# Altium PCB PCB.PcbDoc (part 1 of 2)
Units mm, origin at the board's own origin, x right, y up, seen from the top; angles counter-clockwise.
Board outline 100 x 100 mm, 2 copper layers (Top Layer, Bottom Layer); 45 components, 90 nets, 459 pads, 167 vias.
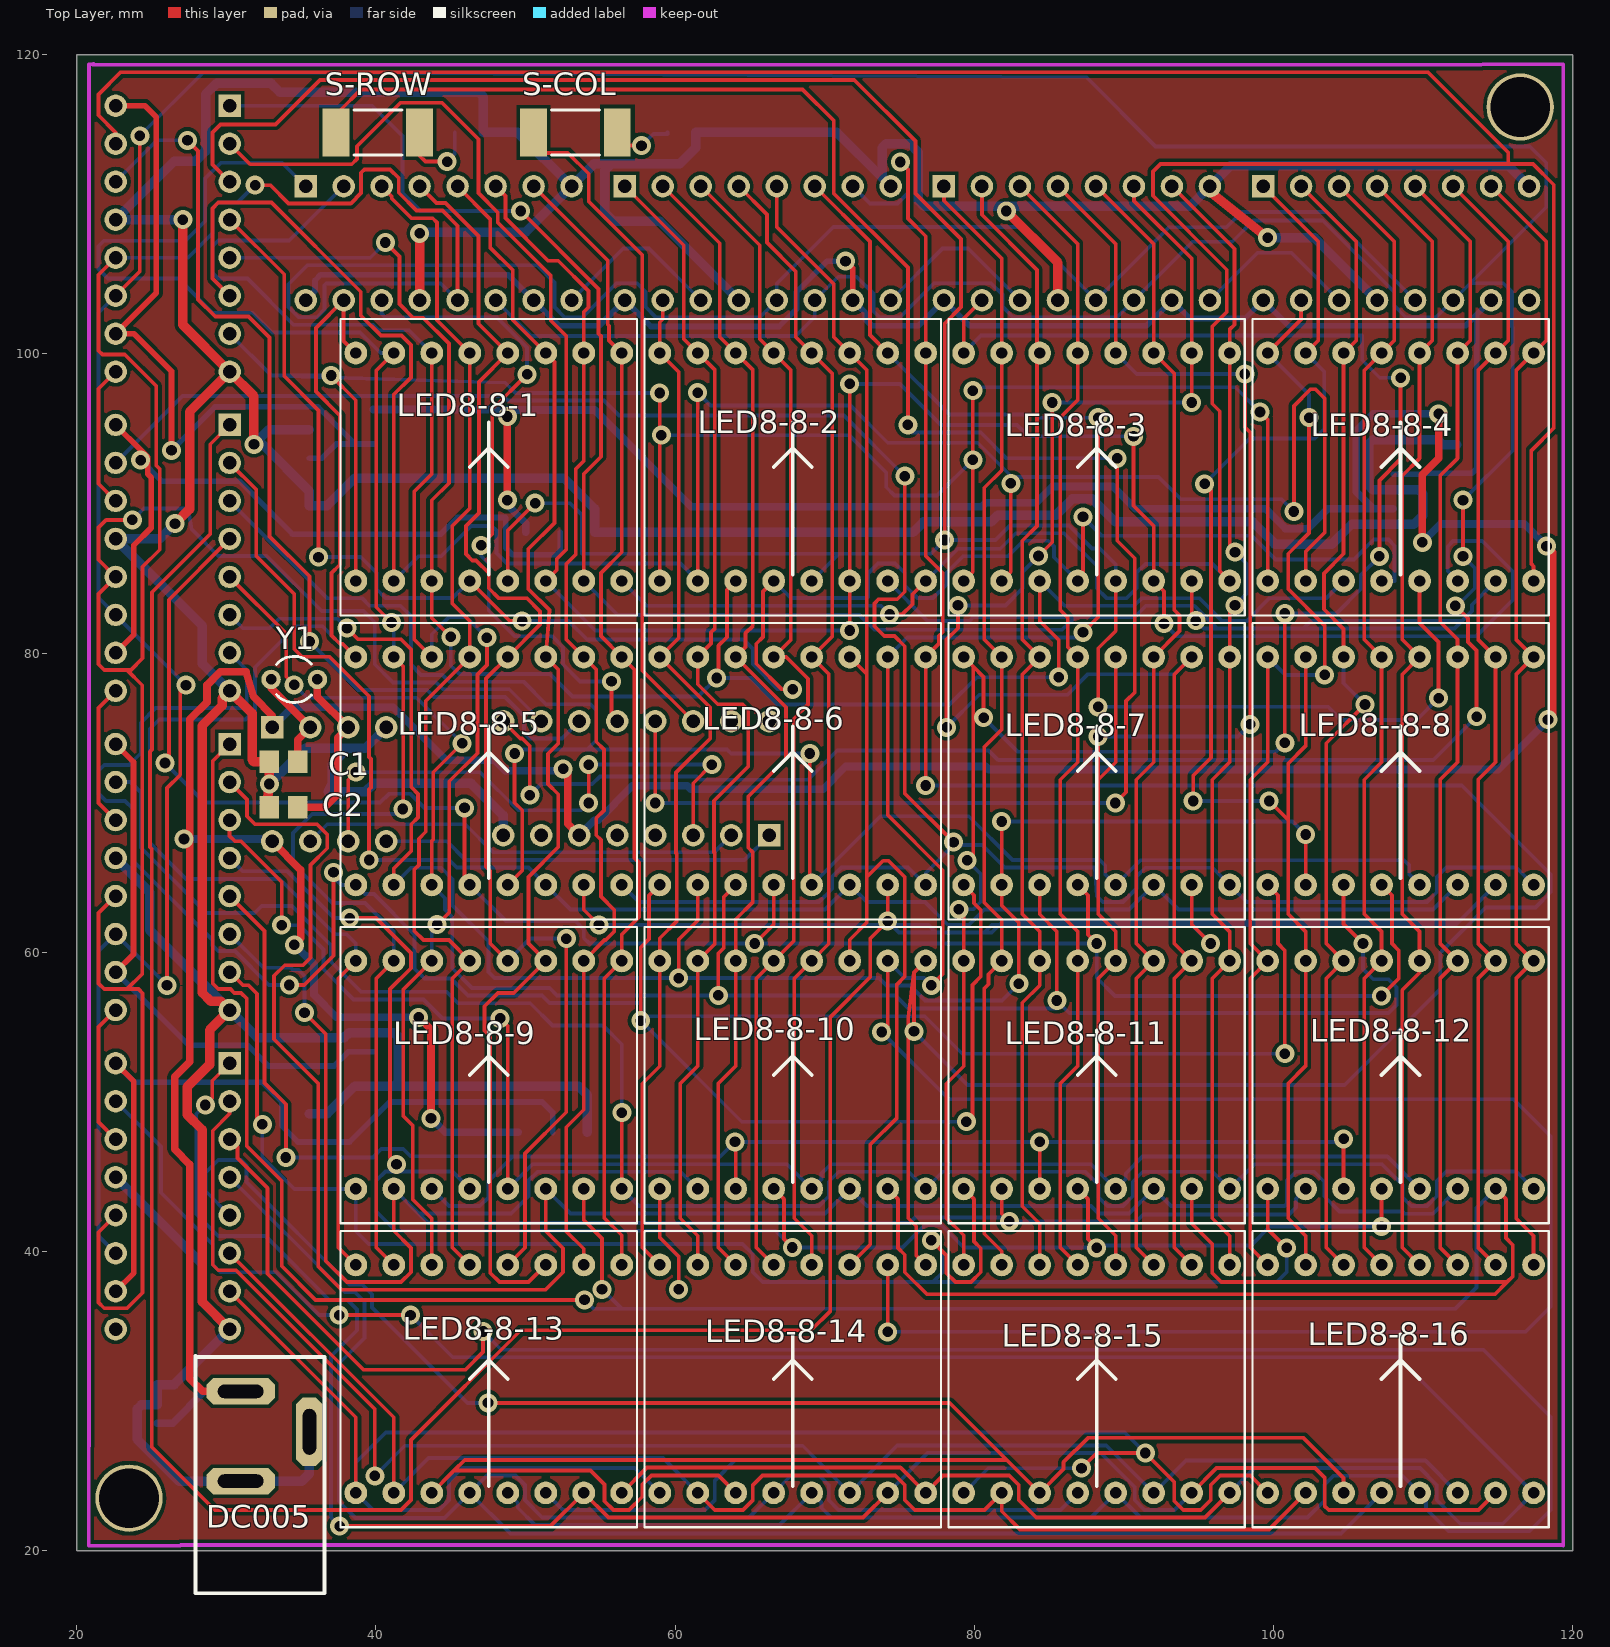
[diagram p0: Top Layer view]
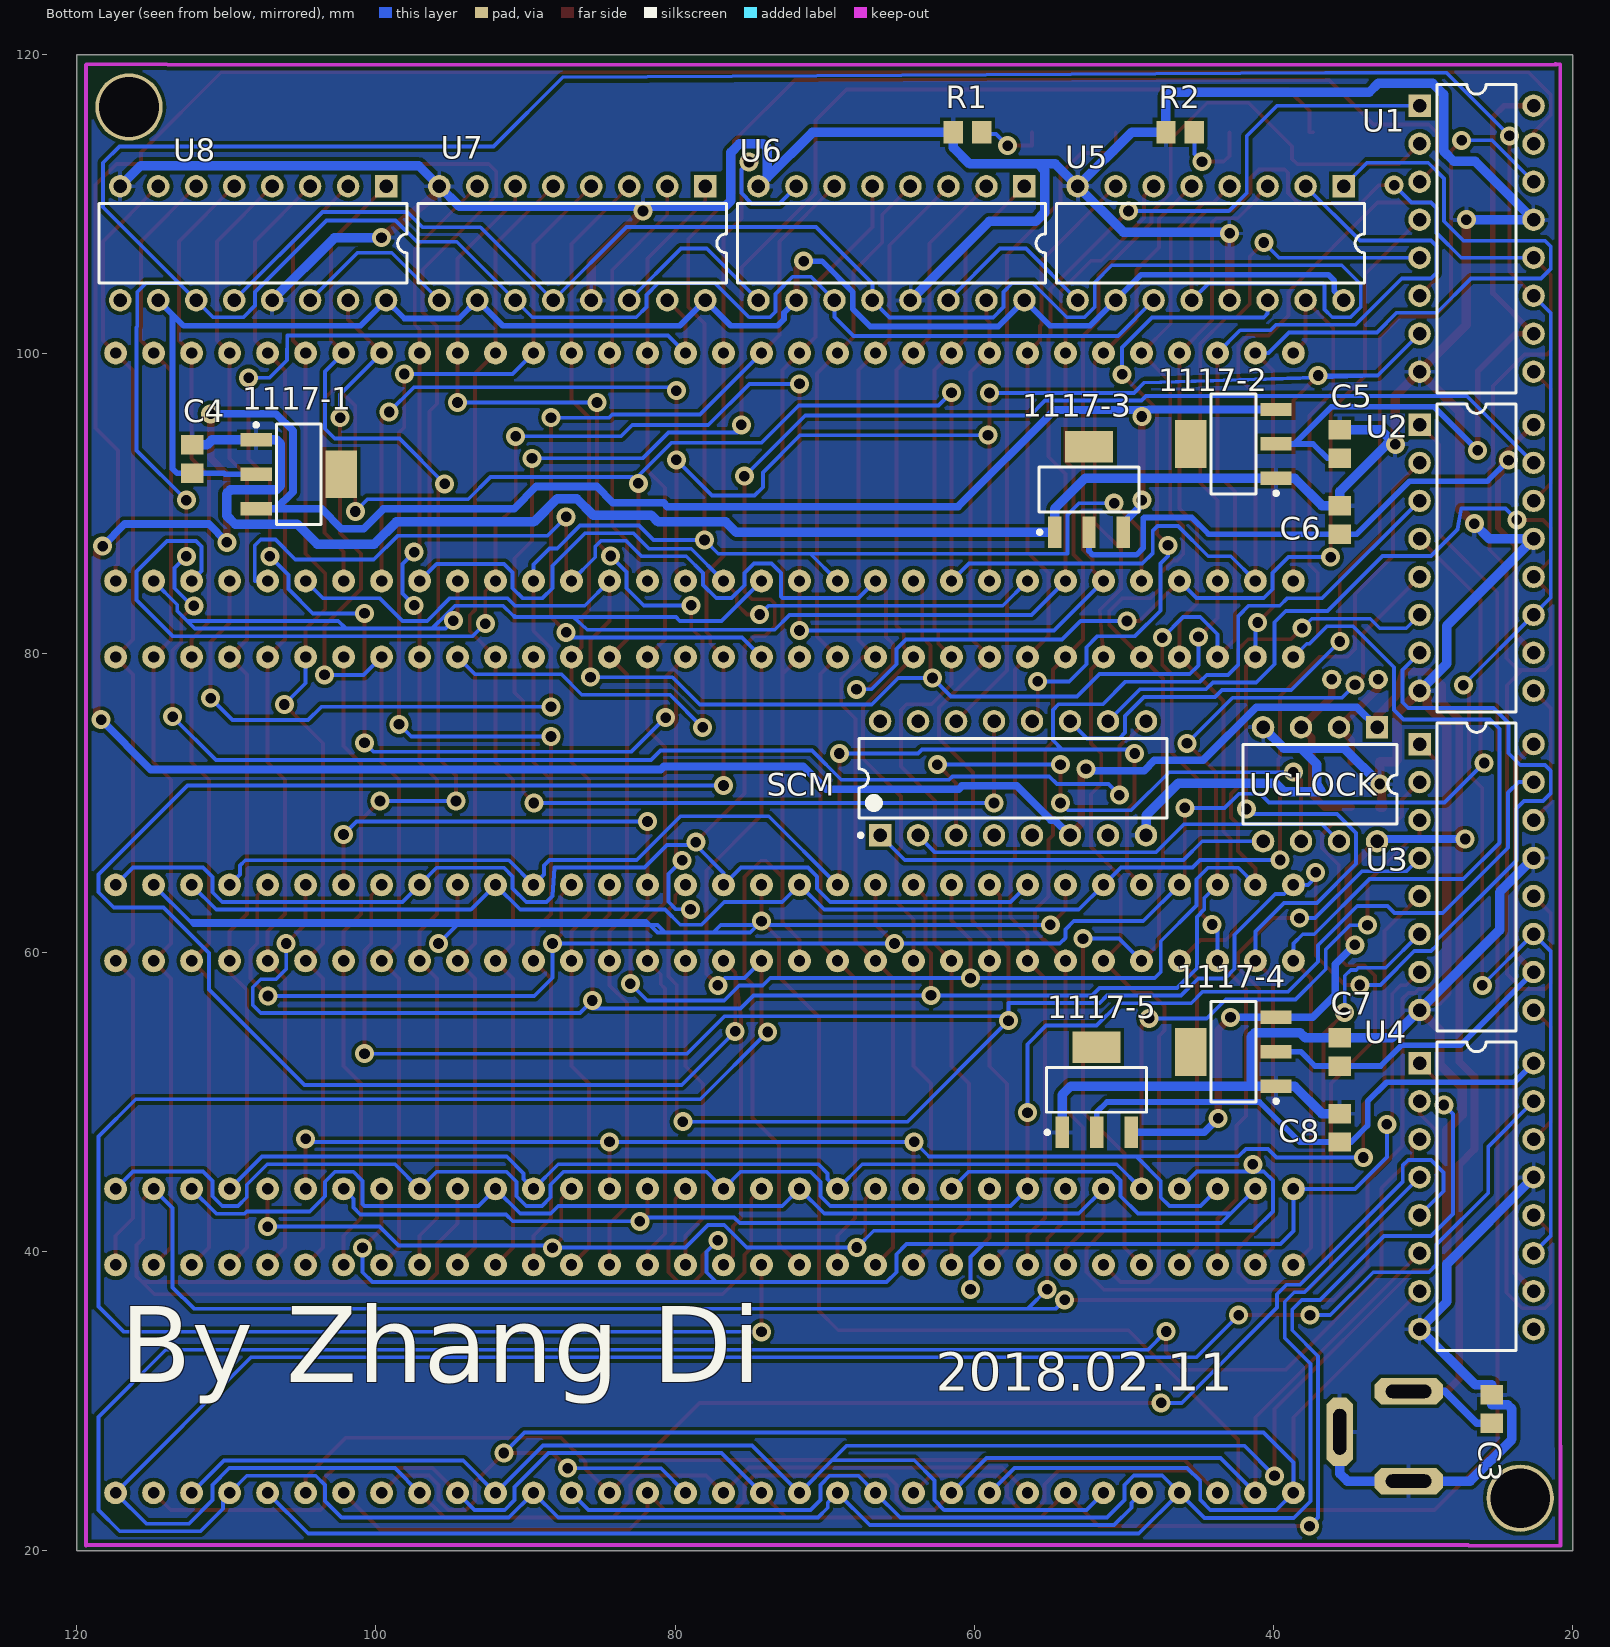
[diagram p1: Bottom Layer view, seen from below]

## Layer stack, top to bottom
Top Layer: signal copper 0.0356
Dielectric: dielectric 0.32, FR-4, Dk 4.8
Bottom Layer: signal copper 0.0356

## Board outline
20,20 20,120 120,120 120,20 20,20

## Design rules (kind name [scope] priority, off if disabled: settings)
Clearance [All] p1: gap=0.254
ComponentClearance [All] p1: gap=0.254 collisioncheckmode=3 verticalgap=0.254
HoleSize [All] p1: absolutevalues=TRUE maxlimit=4 minlimit=0.025 maxpercent=80.000 minpercent=20.000
PolygonConnect [All] p1: connectstyle=Relief reliefconductorwidth=0.254 reliefentries=4 polygonreliefangle="90 Angle"
RoutingVias [All] p1: holewidth=0.711 width=1.27 viastyle="Through Hole" minholewidth=0.711 minwidth=1.27 maxholewidth=0.711 maxwidth=1.27
SMDNeckDown [All] p1: percent=80.000
SolderMaskExpansion [All] p1: expansion=0.102
TestPointUsage [All] p1: valid=0 allowmultiple=FALSE
Testpoint [All] p1: side=15 testpointundercomponent=TRUE minsize=1.016 maxsize=2.54 preferedsize=1.524 minholesize=0 maxholesize=1.016 preferedholesize=0.813 testpointgrid=0.025 style=1023 order=0-112345678
Width V3 [(InNet('V3-1') OR InNet('V3-2') OR InNet('V3-3') OR InNet('V3-4') OR InNet('V3-5'))] p1: maxlimit=0.381 minlimit=0.381 preferedwidth=0.381
Width VCC [InNet('VCC')] p2: maxlimit=0.508 minlimit=0.381 preferedwidth=0.508
Width GND [InNet('GND')] p3: maxlimit=0.762 minlimit=0.381 preferedwidth=0.635
Width CRY [(InNet('NetC1_2') OR InNet('NetC2_2'))] p4: maxlimit=0.508 minlimit=0.508 preferedwidth=0.508
Width ALL [All] p5: maxlimit=0.254 minlimit=0.254 preferedwidth=0.254
17 further rules are at their usual default settings.

## Classes and differential pairs
net class BUSALL[0..1]: BUSALL0 BUSALL1

## Components (designator, comment, footprint, x,y, rotation, side; value= is the part's Value field where it differs from the comment)
1117-1 "POW-1" SOT223-4L 105.156,91.948 r180 bottom
1117-2 "POW-2" SOT223-4L 42.672,93.98 r0 bottom
1117-3 "POW-3" SOT223-4L 52.324,90.932 r90 bottom
1117-4 "POW-4" SOT223-4L 42.672,53.34 r0 bottom
1117-5 "POW-5" SOT223-4L 51.816,50.8 r90 bottom
C1 "Cap Semi" 2012[0805] 33.833,72.746 r0 top
C2 "Cap Semi" 2012[0805] 33.833,69.698 r0 top
C3 "Cap Semi" 2012[0805] 25.4,29.464 r90 bottom
C4 "Cap Semi" 2012[0805] 112.268,92.964 r90 bottom
C5 "Cap Semi" 2012[0805] 35.56,93.98 r90 bottom
C6 "Cap Semi" 2012[0805] 35.56,88.9 r90 bottom
C7 "Cap Semi" 2012[0805] 35.56,53.34 r90 bottom
C8 "Cap Semi" 2012[0805] 35.56,48.26 r90 bottom
DC005 "DC005" DC005 35.56,27.94 r90 top
LED8-8-1 "LED1" LED8-8New 47.548,92.417 r0 top
LED8-8-2 "LED2" LED8-8New 67.868,92.417 r0 top
LED8-8-3 "LED3" LED8-8New 88.188,92.417 r0 top
LED8-8-4 "LED4" LED8-8New 108.508,92.417 r0 top
LED8-8-5 "LED5" LED8-8New 47.548,72.097 r0 top
LED8-8-6 "LED6" LED8-8New 67.868,72.097 r0 top
LED8-8-7 "LED7" LED8-8New 88.188,72.097 r0 top
LED8-8-9 "LED9" LED8-8New 47.548,51.777 r0 top
LED8-8-10 "LED10" LED8-8New 67.868,51.777 r0 top
LED8-8-11 "LED11" LED8-8New 88.188,51.777 r0 top
LED8-8-12 "LED12" LED8-8New 108.508,51.777 r0 top
LED8-8-13 "LED13" LED8-8New 47.548,31.457 r0 top
LED8-8-14 "LED14" LED8-8New 67.868,31.457 r0 top
LED8-8-15 "LED15" LED8-8New 88.188,31.457 r0 top
LED8-8-16 "LED16" LED8-8New 108.508,31.457 r0 top
LED8--8-8 "LED8" LED8-8New 108.508,72.097 r0 top
R1 "Res3" 2012[0805] 60.452,114.808 r180 bottom
R2 "Res3" 2012[0805] 46.228,114.808 r180 bottom
S-COL "SW-PB" 6332[2512] 53.34,114.808 r180 top
S-ROW "SW-PB" 6332[2512] 40.132,114.808 r180 top
SCM "STC15W401AS_SOP16_DIP16" DIP-16#1 57.404,71.628 r90 bottom
U1 "M74HC595B1R" DIP-16#2 26.416,107.696 r270 bottom
U2 "M74HC595B1R" DIP-16#2 26.416,86.36 r270 bottom
U3 "M74HC595B1R" DIP-16#2 26.416,65.024 r270 bottom
U4 "M74HC595B1R" DIP-16#2 26.416,43.688 r270 bottom
U5 "M74HC595B1R" DIP-16#2 44.196,107.391 r0 bottom
U6 "M74HC595B1R" DIP-16#2 65.532,107.391 r0 bottom
U7 "M74HC595B1R" DIP-16#2 86.868,107.391 r0 bottom
U8 "M74HC595B1R" DIP-16#2 108.204,107.391 r0 bottom
UCLOCK "DS1302" DIP8 36.881,71.222 r0 bottom
Y1 "XTAL" R38 34.544,78.232 r270 top

## Footprints (in the part's own frame and the unit in brackets; to place one, negate y for a bottom-side part, rotate by r counter-clockwise, add the part's x,y. Pads: shape width x height; smd on the part's side, far side on the other; paste and mask are expansions set on the pad)
2012[0805] [mm] "Chip Resistor; Body 2.0 x 1.3 mm (LxW typ)"
  rect 1.3x1.5 smd: 1(-0.95,0) 2(0.95,0)
6332[2512] [mm] "Chip Resistor; Body 6.3 x 3.2 mm (LxW typ)"
  rect 1.8x3.2 smd: 1(-2.8,0) 2(2.8,0)
  silkscreen extent -1.6,-1.5 1.6,1.5
DC005 [mil]
  oct 70x180 hole 35 slot 120 at 90 deg: 1(106.3,181.1) 3(-129.92,181.1)
  oct 180x70 hole 35 slot 120 at 0 deg: 2(0,0)
  silkscreen extent -425,-39 200,300
DIP8 [mm] "DIP; 8 Leads; Row Spacing 7.62 mm; Pitch 2.54 mm"
  rect 1.5x1.5 hole 0.9: 1(-3.81,-3.81)
  round 1.5 hole 0.9: 2(-1.27,-3.81) 3(1.27,-3.81) 4(3.81,-3.81) 5(3.81,3.81) 6(1.27,3.81) 7(-1.27,3.81) 8(-3.81,3.81)
  silkscreen extent -5.15,-2.65 5.15,2.65
DIP-16#1 [mm] "DIP, 16-Pin, Row Spacing 7.62 mm, Pitch 2.54 mm"
  rect 1.5x1.5 hole 0.9: 1(-3.81,8.89)
  round 1.5 hole 0.9: 2(-3.81,6.35) 3(-3.81,3.81) 4(-3.81,1.27) 5(-3.81,-1.27) 6(-3.81,-3.81) 7(-3.81,-6.35) 8(-3.81,-8.89) 9(3.81,-8.89) 10(3.81,-6.35) 11(3.81,-3.81) 12(3.81,-1.27) 13(3.81,1.27) 14(3.81,3.81) 15(3.81,6.35) 16(3.81,8.89)
  silkscreen extent -3.93,-10.3 2.65,10.32, body extent -3.6,-10.28 3.6,10.28, height 5.08
DIP-16#2 [mm] "DIP; 16 Leads; Row Spacing 7.62 mm; Pitch 2.54 mm"
  rect 1.5x1.5 hole 0.9: 1(-8.89,-3.81)
  round 1.5 hole 0.9: 2(-6.35,-3.81) 3(-3.81,-3.81) 4(-1.27,-3.81) 5(1.27,-3.81) 6(3.81,-3.81) 7(6.35,-3.81) 8(8.89,-3.81) 9(8.89,3.81) 10(6.35,3.81) 11(3.81,3.81) 12(1.27,3.81) 13(-1.27,3.81) 14(-3.81,3.81) 15(-6.35,3.81) 16(-8.89,3.81)
  silkscreen extent -10.3,-2.65 10.3,2.65
LED8-8New [mil]
  round 60 hole 30: 1(-350,-299.21) 2(-250,-299.21) 3(-150,-299.21) 4(-50,-299.21) 5(50,-299.21) 6(150,-299.21) 7(250,-299.21) 8(350,-299.21) 9(350,300.79) 10(250,300.79) 11(150,300.79) 12(50,300.79) 13(-50,300.79) 14(-150,300.79) 15(-250,300.79) 16(-350,300.79)
  silkscreen extent -390,-390 390,390
R38 [mm] "Crystal, Thru-Hole; 2 Leads; Body 3.1 x 8.2 mm (Dia.xH)"
  round 1.3 hole 0.7: 1(0,1.55) 2(0,-1.55)
  silkscreen extent -1.55,-1.19 1.55,1.17
SOT223-4L [mm] "SOT223, 4-Leads, Body 6.5x3.5mm, Pitch 2.3mm, Lead Span 7mm, IPC High Density"
  rect 2.1x0.9 smd: 1(-2.85,2.3) 2(-2.85,0) 3(-2.85,-2.3)
  rect 2.1x3.2 smd: 4(2.85,0)
  silkscreen extent -2.98,-3.35 1.5,3.42, body extent -1.85,-3.35 1.85,3.35, height 1.8

## Part data
1117-1 1117-2 1117-3 1117-4 1117-5: library part 1117
C1 C2 C3 C4 C5 C6 C7 C8: "Capacitor (Semiconductor SIM Model)"
LED8-8-1 LED8-8-2 LED8-8-3 LED8-8-4 LED8-8-5 LED8-8-6 LED8-8-7 LED8-8-9 LED8-8-10 LED8-8-11 LED8-8-12 LED8-8-13 LED8-8-14 LED8-8-15 LED8-8-16 LED8--8-8: library part LED8-8
R1 R2: "Resistor"
S-COL S-ROW: "Switch"
U1 U2 U3 U4 U5 U6 U7 U8: "8 Bit Shift Register with Output Latches (3 STATE)"
UCLOCK: "Trickle Charge Timekeeping Chip"
Y1: "Crystal Oscillator"

## Free pads (board coordinates)
  round 4.5 hole 4: 1(116.5,116.5) 3(23.5,23.5)

## Via types
v1: diameter 1.27, hole 0.711, Top Layer to Bottom Layer, 167 vias

## Nets (pads, with @x,y where several pads share a name; then routed paths per layer and width w, separated by ;. In a path a pad name is that pad's centre, name@x,y a point inside that pad or via, vN(x,y) a via of type N, cw(c..) or ccw(c..) an arc to the next point about the centre after c; other vN are vias at no path point)
COL1: LED8-8-1.16 LED8-8-5.16 LED8-8-9.16 LED8-8-13.16 U5.15 | length 95.9
  Top Layer w0.254: LED8-8-13.16@38.658,39.097 37.49,40.265 37.49,58.249 LED8-8-9.16@38.658,59.417 ; LED8-8-5.16@38.658,79.737 37.77,80.625 37.592,80.625 37.038,81.178 37.038,85.349 37.592,85.903 37.592,95.885 35.992,97.485 35.992,101.727 U5.15@37.846,103.581 37.846,100.869 LED8-8-1.16@38.658,100.057
  Bottom Layer w0.254: LED8-8-9.16@38.658,59.417 38.658,60.58 38.033,61.205 37.271,61.205 33.578,64.897 27.305,64.897 24.892,67.31 24.892,74.942 25.515,75.565 31.293,75.565 31.928,76.2 31.928,79.045 34.671,81.788 36.424,81.788 37.587,80.625 37.77,80.625 LED8-8-5.16@38.658,79.737
COL2: LED8-8-1.15 LED8-8-5.15 LED8-8-9.15 LED8-8-13.15 U5.1 | length 115.7
  Top Layer w0.254: v1(41.046,82.042) 40.03,83.058 40.03,98.889 LED8-8-1.15@41.198,100.057 ; LED8-8-13.15@41.198,39.097 40.03,40.265 40.03,58.249 LED8-8-9.15@41.198,59.417 ; LED8-8-5.15@41.198,79.737 41.834,79.101 41.834,69.596 v1(41.808,69.571)
  Bottom Layer w0.254: U5.1@35.306,111.201 33.731,112.776 29.642,112.776 28.587,111.721 28.587,108.863 27.281,107.557 21.832,107.557 21.463,107.188 21.463,105.664 22.098,105.029 26.797,105.029 29.083,102.743 31.763,102.743 33.072,101.434 38.948,101.434 40.325,100.057 LED8-8-1.15@41.198,100.057 ; v1(41.046,82.042) 41.198,81.89 LED8-8-5.15@41.198,79.737 ; LED8-8-9.15@41.198,59.417 41.198,61.378 39.28,63.297 37.084,63.297 34.468,65.913 34.468,67.97 35.744,69.247 41.485,69.247 v1(41.808,69.571)
COL3: LED8-8-1.14 LED8-8-5.14 LED8-8-9.14 LED8-8-13.14 U5.2 | length 101.6
  Top Layer w0.254: LED8-8-13.14@43.738,39.097 43.738,42.19 42.469,43.459 42.469,48.412 41.834,49.047 41.834,57.513 LED8-8-9.14@43.738,59.417 ; LED8-8-5.14@43.738,79.737 42.57,80.905 42.57,90.805 43.738,91.973 LED8-8-1.14@43.738,100.057 ; v1(44.094,61.849) 44.907,62.662 44.907,71.423 46.787,73.302 46.787,78.562 47.422,79.197 v1(47.422,81.026)
  Bottom Layer w0.254: U5.2@37.846,111.201 34.214,107.569 29.464,107.569 29.095,107.2 29.095,105.398 29.464,105.029 31.413,105.029 34.499,101.942 39.827,101.942 40.195,101.575 42.221,101.575 LED8-8-1.14@43.738,100.057 ; LED8-8-9.14@43.738,59.417 43.738,61.493 v1(44.094,61.849) ; LED8-8-5.14@43.738,79.737 43.738,81.252 44.89,82.404 46.044,82.404 v1(47.422,81.026)
COL4: LED8-8-1.13 LED8-8-5.13 LED8-8-9.13 LED8-8-13.13 U5.3 | length 81.4
  Top Layer w0.254: U5.3@40.386,111.201 41.061,110.527 41.061,110.387 42.38,109.068 43.802,109.068 44.094,108.776 44.094,102.241 LED8-8-1.13@46.278,100.057 46.278,89.661 45.11,88.494 45.11,83.318 46.278,82.151 LED8-8-5.13@46.278,79.737 43.332,76.791 43.332,68.047 42.875,67.589 42.875,65.825 42.57,65.521 42.57,61.424 43.18,60.814 44.881,60.814 LED8-8-9.13@46.278,59.417 45.11,58.249 45.11,40.265 LED8-8-13.13@46.278,39.097
COL5: LED8-8-1.12 LED8-8-5.12 LED8-8-9.12 LED8-8-13.12 U5.4 | length 89.1
  Top Layer w0.254: U5.4@42.926,111.201 44.044,110.084 44.662,110.084 46.863,107.882 46.863,102.012 LED8-8-1.12@48.818,100.057 46.888,98.127 46.888,89.357 46.025,88.494 46.025,86.614 46.448,86.191 46.702,86.191 47.549,85.344 47.549,84.328 48.209,83.668 50.088,83.668 50.978,82.778 50.978,81.897 LED8-8-5.12@48.818,79.737 47.371,78.29 47.371,65.71 47.65,65.43 47.65,60.585 LED8-8-9.12@48.818,59.417 ; LED8-8-13.12@48.818,39.097 49.962,40.241 49.962,46.533 52.73,49.301 v1(52.73,60.909)
  Bottom Layer w0.254: LED8-8-9.12@48.818,59.417 50.31,60.909 v1(52.73,60.909)
COL6: LED8-8-1.11 LED8-8-5.11 LED8-8-9.11 LED8-8-13.11 U5.5 | length 85.8
  Top Layer w0.254: U5.5@45.466,111.201 47.642,109.025 47.642,107.106 49.149,105.599 49.149,102.266 LED8-8-1.11@51.358,100.057 51.943,99.472 51.943,88.697 50.19,86.944 50.19,84.284 51.607,82.867 LED8-8-5.11@51.358,79.737 52.197,78.898 52.197,73.955 51.511,73.269 51.511,71.247 52.197,70.561 52.197,67.031 50.203,65.037 50.203,60.572 LED8-8-9.11@51.358,59.417 49.218,57.277 48.158,57.277 47.269,56.388 47.269,54.762 47.65,54.381 47.65,38.557 48.26,37.948 50.209,37.948 LED8-8-13.11@51.358,39.097
COL7: LED8-8-1.10 LED8-8-5.10 LED8-8-9.10 LED8-8-13.10 U5.6 | length 79.3
  Top Layer w0.254: U5.6@48.006,111.201 48.658,110.549 48.658,109.072 51.505,106.225 52.195,106.225 54.217,104.203 54.217,103.112 53.898,102.793 LED8-8-1.10@53.898,100.057 53.898,92.836 53.365,92.304 53.365,86.589 52.73,85.954 52.73,80.905 LED8-8-5.10@53.898,79.737 54.737,78.898 54.737,74.066 55.245,73.558 55.245,69.469 54.737,68.961 54.737,67.818 55.042,67.513 55.042,63.729 55.931,62.84 55.931,61.366 55.372,60.808 55.289,60.808 LED8-8-9.10@53.898,59.417 53.898,49.469 52.73,48.301 52.73,41.338 53.898,40.17 LED8-8-13.10@53.898,39.097
COL8: LED8-8-1.9 LED8-8-5.9 LED8-8-9.9 LED8-8-13.9 U5.7 | length 77.6
  Top Layer w0.254: U5.7@50.546,111.201 55.499,106.248 55.499,101.955 55.594,101.86 55.594,100.901 LED8-8-1.9@56.438,100.057 56.438,86.74 55.042,85.344 55.042,81.133 LED8-8-5.9@56.438,79.737 57.277,78.898 57.277,66.294 57.582,65.989 57.582,62.332 56.438,61.188 LED8-8-9.9@56.438,59.417 55.27,58.249 55.27,42.24 56.438,41.072 LED8-8-13.9@56.438,39.097
COL9: LED8-8-2.16 LED8-8-6.16 LED8-8-10.16 LED8-8-14.16 U6.15 | length 69.4
  Top Layer w0.254: LED8-8-14.16@58.978,39.097 57.81,40.265 57.81,51.207 58.978,52.375 LED8-8-10.16@58.978,59.417 58.978,60.934 60.122,62.078 60.122,66.573 60.071,66.624 60.071,72.009 62.357,74.295 62.357,76.358 LED8-8-6.16@58.978,79.737 60.249,81.008 60.249,98.786 LED8-8-2.16@58.978,100.057 58.978,102.108 59.182,102.312 U6.15@59.182,103.581
COL10: LED8-8-2.15 LED8-8-6.15 LED8-8-10.15 LED8-8-14.15 U6.1 | length 79.9
  Top Layer w0.254: U6.1@56.642,111.201 60.579,107.264 60.579,100.996 LED8-8-2.15@61.518,100.057 62.662,98.913 62.662,81.643 62.407,81.388 62.407,80.626 LED8-8-6.15@61.518,79.737 61.518,77.915 62.853,76.581 64.516,76.581 64.897,76.2 64.897,72.415 62.611,70.129 62.611,66.675 62.662,66.624 62.662,60.561 LED8-8-10.15@61.518,59.417 61.518,52.4 60.35,51.232 60.35,42.214 61.518,41.046 LED8-8-14.15@61.518,39.097
COL11: LED8-8-2.14 LED8-8-6.14 LED8-8-10.14 LED8-8-14.14 U6.2 | length 79.1
  Top Layer w0.254: U6.2@59.182,111.201 62.992,107.391 62.992,101.123 LED8-8-2.14@64.058,100.057 65.202,98.913 65.202,81.817 64.713,81.328 64.713,80.392 LED8-8-6.14@64.058,79.737 67.425,76.37 67.425,72.937 64.897,70.409 64.897,66.98 65.202,66.675 65.202,63.348 64.058,62.204 LED8-8-10.14@64.058,59.417 64.058,52.4 62.89,51.232 62.89,40.265 LED8-8-14.14@64.058,39.097
COL12: LED8-8-2.13 LED8-8-6.13 LED8-8-10.13 LED8-8-14.13 U6.3 | length 78.4
  Top Layer w0.254: U6.3@61.722,111.201 65.659,107.264 65.659,100.996 LED8-8-2.13@66.598,100.057 67.742,98.913 67.742,80.881 LED8-8-6.13@66.598,79.737 67.431,79.737 68.885,78.283 68.885,76.556 67.933,75.604 67.933,60.752 LED8-8-10.13@66.598,59.417 65.43,58.249 65.43,40.265 LED8-8-14.13@66.598,39.097
COL13: LED8-8-2.12 LED8-8-6.12 LED8-8-10.12 LED8-8-14.12 U6.4 | length 77.2
  Top Layer w0.254: U6.4@64.262,111.201 66.142,109.322 66.142,107.442 68.072,105.512 68.072,101.123 LED8-8-2.12@69.138,100.057 70.51,98.685 70.51,81.109 LED8-8-6.12@69.138,79.737 70.282,78.593 70.282,60.561 LED8-8-10.12@69.138,59.417 67.97,58.249 67.97,42.214 69.138,41.046 LED8-8-14.12@69.138,39.097
COL14: LED8-8-2.11 LED8-8-6.11 LED8-8-10.11 LED8-8-14.11 U6.5 | length 87.3
  Top Layer w0.254: U6.5@66.802,111.201 66.802,108.483 70.612,104.673 70.612,101.123 LED8-8-2.11@71.678,100.057 72.822,98.913 72.822,78.593 ; LED8-8-14.11@71.678,39.097 73.05,40.469 73.05,47.142 74.828,48.92 74.828,57.836 75.361,58.369 75.361,65.024 74.269,66.116 73.914,66.116 72.822,65.024 ; LED8-8-10.11@71.678,59.417 71.678,60.832 72.822,61.976 72.822,65.024 ; LED8-8-6.11@71.678,79.737 72.822,78.593 ; 72.822,65.024 72.822,78.593
COL15: LED8-8-2.10 LED8-8-6.10 LED8-8-10.10 LED8-8-14.10 U6.6 | length 198.3
  Top Layer w0.254: U6.6@69.342,111.201 73.025,107.518 73.025,101.25 LED8-8-2.10@74.218,100.057 ; v1(73.812,54.661) 74.218,55.067 LED8-8-10.10@74.218,59.417 ; v1(74.218,34.62) LED8-8-14.10@74.218,39.097 ; LED8-8-6.10@74.218,79.737 74.218,69.165 77.902,65.481 77.902,58.547 v1(77.14,57.785) ; v1(87.274,81.382) 88.29,82.398 v1(88.29,95.733)
  Bottom Layer w0.254: v1(73.812,54.661) 78.308,50.165 116.053,50.165 118.542,47.676 118.542,36.322 116.84,34.62 v1(74.218,34.62) ; LED8-8-10.10@74.218,59.417 75.361,58.274 76.651,58.274 v1(77.14,57.785) ; LED8-8-6.10@74.218,79.737 75.529,81.048 86.94,81.048 v1(87.274,81.382) ; LED8-8-2.10@74.218,100.057 78.339,95.936 84.201,95.936 84.404,95.733 v1(88.29,95.733)
COL16: LED8-8-2.9 LED8-8-6.9 LED8-8-10.9 LED8-8-14.9 U6.7 | length 171.4
  Top Layer w0.254: v1(75.057,112.827) 75.565,112.319 75.565,109.049 76.758,107.856 LED8-8-2.9@76.758,100.057 76.758,86.488 77.902,85.344 77.902,81.388 77.647,81.133 77.647,80.626 LED8-8-6.9@76.758,79.737 v1(76.758,71.146) ; v1(75.978,54.705) 75.978,58.637 ; LED8-8-14.9@76.758,39.097 76.123,39.732 76.123,41.681 75.59,42.214 75.59,54.705 75.59,55.633 75.978,58.637 ; LED8-8-10.9@76.758,59.417 75.978,58.637
  Bottom Layer w0.254: U6.7@71.882,111.201 73.025,110.058 74.879,110.058 75.565,110.744 75.565,112.319 v1(75.057,112.827) ; v1(75.978,54.705) 79.553,51.13 104.775,51.13 111.15,57.506 111.15,59.944 114.198,62.992 117.526,62.992 118.542,64.008 118.542,65.202 112.598,71.146 v1(76.758,71.146)
COL17: LED8-8-3.16 LED8-8-7.16 LED8-8-11.16 LED8-8-15.16 U7.15 | length 134.2
  Top Layer w0.254: v1(78.969,62.865) 79.298,62.535 LED8-8-11.16@79.298,59.417 79.298,52.375 78.13,51.207 78.13,42.24 79.298,41.072 LED8-8-15.16@79.298,39.097 ; LED8-8-7.16@79.298,79.737 79.934,79.101 ; LED8-8-3.16@79.298,100.057 79.298,102.361 U7.15@80.518,103.581 ; v1(79.527,66.142) 79.934,66.548 79.934,75.68 79.934,79.101 ; v1(80.63,75.68) 80.63,78.405 79.934,79.101 ; v1(100.762,73.99) v1(100.762,82.652) ; v1(107.086,86.462) 107.086,91.542 108.509,92.964 v1(108.509,98.4)
  Bottom Layer w0.254: v1(78.969,62.865) 79.934,62.865 80.442,63.373 80.442,65.227 v1(79.527,66.142) ; LED8-8-3.16@79.298,100.057 80.46,101.219 105.918,101.219 105.943,99.568 107.112,98.4 v1(108.509,98.4) ; v1(80.63,75.68) 82.905,73.406 100.178,73.406 v1(100.762,73.99) ; v1(100.762,82.652) 104.216,82.652 105.842,84.277 105.842,85.217 v1(107.086,86.462)
COL18: LED8-8-3.15 LED8-8-7.15 LED8-8-11.15 LED8-8-15.15 U7.1 | length 76.6
  Top Layer w0.254: U7.1@77.978,111.201 77.978,110.236 81.838,106.376 LED8-8-3.15@81.838,100.057 81.838,92.213 80.67,91.045 80.67,80.905 LED8-8-7.15@81.838,79.737 81.838,74.879 80.67,73.711 80.67,63.328 81.838,62.16 LED8-8-11.15@81.838,59.417 80.949,58.528 80.949,57.852 80.67,57.573 80.67,41.177 81.838,40.009 LED8-8-15.15@81.838,39.097
COL19: LED8-8-3.14 LED8-8-7.14 LED8-8-11.14 LED8-8-15.14 U7.2 | length 76.6
  Top Layer w0.254: U7.2@80.518,111.201 80.518,109.296 84.201,105.613 LED8-8-3.14@84.201,100.057 ; LED8-8-15.14@84.378,39.097 84.378,41.845 83.21,43.013 83.21,56.617 84.378,57.784 LED8-8-11.14@84.378,59.417 84.378,61.392 83.21,62.56 83.21,78.569 LED8-8-7.14@84.378,79.737 83.21,80.905 83.21,87.503 84.201,88.494 LED8-8-3.14@84.201,100.057 ; LED8-8-3.14@84.378,100.057 LED8-8-3.14@84.201,100.057
COL20: LED8-8-3.13 LED8-8-7.13 LED8-8-11.13 LED8-8-15.13 U7.3 | length 76.6
  Top Layer w0.254: U7.3@83.058,111.201 86.918,107.341 LED8-8-3.13@86.918,100.057 86.918,96.908 85.75,95.74 85.75,82.88 86.258,82.372 86.258,80.397 LED8-8-7.13@86.918,79.737 86.918,72.695 85.75,71.527 85.75,62.56 86.918,61.392 LED8-8-11.13@86.918,59.417 86.918,52.4 85.75,51.232 85.75,40.265 LED8-8-15.13@86.918,39.097
COL21: LED8-8-3.12 LED8-8-7.12 LED8-8-11.12 LED8-8-15.12 U7.4 | length 101.5
  Top Layer w0.254: U7.4@85.598,111.201 89.458,107.341 LED8-8-3.12@89.458,100.057 ; v1(88.29,74.422) 88.29,71.527 ; LED8-8-15.12@89.458,39.097 89.458,41.046 88.29,42.214 88.29,58.249 LED8-8-11.12@89.458,59.417 89.458,61.392 88.29,62.56 88.29,71.527 ; LED8-8-7.12@89.458,79.737 89.458,72.695 88.29,71.527 ; v1(98.095,98.654) 98.095,95.098 98.45,94.742 v1(98.45,75.235)
  Bottom Layer w0.254: v1(88.29,74.422) 97.638,74.422 v1(98.45,75.235) ; LED8-8-3.12@89.458,100.057 90.862,98.654 v1(98.095,98.654)
COL22: LED8-8-3.11 LED8-8-7.11 LED8-8-11.11 LED8-8-15.11 U7.5 | length 77.1
  Top Layer w0.254: U7.5@88.138,111.201 91.998,107.341 LED8-8-3.11@91.998,100.057 93.37,98.685 93.37,82.88 93.726,82.525 93.726,81.465 LED8-8-7.11@91.998,79.737 91.998,72.695 90.83,71.527 90.83,60.585 LED8-8-11.11@91.998,59.417 90.83,58.249 90.83,40.265 LED8-8-15.11@91.998,39.097
COL23: LED8-8-3.10 LED8-8-7.10 LED8-8-11.10 LED8-8-15.10 U7.6 | length 112.8
  Top Layer w0.254: v1(78.155,75.032) 78.155,80.899 78.918,81.662 v1(78.918,83.185) ; v1(84.303,86.487) 85.217,87.401 v1(85.217,96.749) ; U7.6@90.678,111.201 90.678,110.225 94.538,106.365 LED8-8-3.10@94.538,100.057 v1(94.538,96.749) ; LED8-8-15.10@94.538,39.097 93.37,40.265 93.37,58.249 LED8-8-11.10@94.538,59.417 93.37,60.585 93.37,78.569 LED8-8-7.10@94.538,79.737
  Bottom Layer w0.254: v1(78.155,75.032) 80.34,77.216 86.233,77.216 87.605,78.588 93.389,78.588 LED8-8-7.10@94.538,79.737 ; v1(78.918,83.185) 82.092,83.185 83.235,84.328 83.235,85.42 v1(84.303,86.487) ; v1(85.217,96.749) v1(94.538,96.749)
COL24: LED8-8-3.9 LED8-8-7.9 LED8-8-11.9 LED8-8-15.9 U7.7 | length 76.8
  Top Layer w0.254: U7.7@93.218,111.201 97.397,107.022 97.397,101.942 97.078,101.623 LED8-8-3.9@97.078,100.057 97.078,87.097 v1(97.434,86.741) ; LED8-8-15.9@97.078,39.097 97.078,41.046 95.91,42.214 95.91,58.249 LED8-8-11.9@97.078,59.417 97.078,61.392 95.91,62.56 95.91,71.527 97.078,72.695 LED8-8-7.9@97.078,79.737 97.078,82.829 v1(97.434,83.185)
  Bottom Layer w0.254: v1(97.434,83.185) 98.222,83.972 98.222,85.954 v1(97.434,86.741)
COL25: LED8-8-4.16 LED8-8-12.16 LED8-8-16.16 LED8--8-8.16 U8.15 | length 75.6
  Top Layer w0.254: LED8-8-16.16@99.618,39.097 98.45,40.265 98.45,58.249 LED8-8-12.16@99.618,59.417 98.45,60.585 98.45,71.527 99.618,72.695 LED8--8-8.16@99.618,79.737 ; LED8-8-4.16@99.618,100.057 101.854,102.293 U8.15@101.854,103.581 ; v1(102.387,95.738) 102.387,88.029 100.99,86.632 100.99,84.277 103.429,81.839 v1(103.429,78.537)
  Bottom Layer w0.254: LED8--8-8.16@99.618,79.737 100.818,78.537 v1(103.429,78.537) ; LED8-8-4.16@99.618,100.057 102.387,97.288 v1(102.387,95.738)
COL26: LED8-8-4.15 LED8-8-12.15 LED8-8-16.15 LED8--8-8.15 U8.1 | length 99.5
  Top Layer w0.254: v1(94.64,70.104) 94.64,71.806 95.834,73 95.834,90.881 v1(95.402,91.313) ; U8.1@99.314,111.201 102.997,107.518 102.997,100.896 LED8-8-4.15@102.158,100.057 ; v1(99.72,70.104) 100.99,68.834 ; LED8-8-16.15@102.158,39.097 102.158,41.046 100.99,42.214 100.99,51.232 102.158,52.4 LED8-8-12.15@102.158,59.417 102.158,61.392 100.99,62.56 100.99,68.834 ; LED8--8-8.15@102.158,79.737 102.158,73.786 100.99,72.619 100.99,68.834
  Bottom Layer w0.254: v1(94.64,70.104) v1(99.72,70.104) ; v1(95.402,91.313) 98.425,94.336 102.743,94.336 103.403,94.996 103.403,98.812 LED8-8-4.15@102.158,100.057
COL27: LED8-8-4.14 LED8-8-12.14 LED8-8-16.14 LED8--8-8.14 U8.2 | length 78.2
  Top Layer w0.254: U8.2@101.854,111.201 105.537,107.518 105.537,100.896 LED8-8-4.14@104.698,100.057 104.698,86.639 103.378,85.319 103.378,82.931 104.698,81.611 LED8--8-8.14@104.698,79.737 ; LED8-8-16.14@104.698,39.097 103.53,40.265 103.53,58.249 LED8-8-12.14@104.698,59.417 103.53,60.585 103.53,73.965 v1(106.121,76.556)
  Bottom Layer w0.254: LED8--8-8.14@104.698,79.737 104.698,77.979 v1(106.121,76.556)
COL28: LED8-8-4.13 LED8-8-12.13 LED8-8-16.13 LED8--8-8.13 U8.3 | length 76.9
  Top Layer w0.254: U8.3@104.394,111.201 108.077,107.518 108.077,100.896 LED8-8-4.13@107.238,100.057 106.07,98.889 106.07,80.905 LED8--8-8.13@107.238,79.737 107.238,72.695 106.07,71.527 106.07,62.56 107.238,61.392 LED8-8-12.13@107.238,59.417 106.07,58.249 106.07,40.265 LED8-8-16.13@107.238,39.097
COL29: LED8-8-4.12 LED8-8-12.12 LED8-8-16.12 LED8--8-8.12 U8.4 | length 76.9
  Top Layer w0.254: U8.4@106.934,111.201 110.617,107.518 110.617,100.896 LED8-8-4.12@109.778,100.057 109.778,93.015 108.61,91.847 108.61,80.905 LED8--8-8.12@109.778,79.737 108.61,78.569 108.61,62.56 109.778,61.392 LED8-8-12.12@109.778,59.417 109.778,58.63 108.61,57.462 108.61,40.265 LED8-8-16.12@109.778,39.097
COL30: LED8-8-4.11 LED8-8-12.11 LED8-8-16.11 LED8--8-8.11 U8.5 | length 76.9
  Top Layer w0.254: U8.5@109.474,111.201 113.157,107.518 113.157,100.896 LED8-8-4.11@112.318,100.057 112.318,93.015 111.15,91.847 111.15,82.085 112.318,80.917 LED8--8-8.11@112.318,79.737 112.318,72.695 111.15,71.527 111.15,60.585 LED8-8-12.11@112.318,59.417 111.15,58.249 111.15,40.265 LED8-8-16.11@112.318,39.097
COL31: LED8-8-4.10 LED8-8-12.10 LED8-8-16.10 LED8--8-8.10 U8.6 | length 76.9
  Top Layer w0.254: U8.6@112.014,111.201 115.697,107.518 115.697,100.896 LED8-8-4.10@114.858,100.057 113.69,98.889 113.69,80.905 LED8--8-8.10@114.858,79.737 114.858,72.695 113.69,71.527 113.69,60.585 LED8-8-12.10@114.858,59.417 113.69,58.249 113.69,40.265 LED8-8-16.10@114.858,39.097
COL32: LED8-8-4.9 LED8-8-12.9 LED8-8-16.9 LED8--8-8.9 U8.7 | length 76.9
  Top Layer w0.254: U8.7@114.554,111.201 118.237,107.518 118.237,100.896 LED8-8-4.9@117.398,100.057 116.23,98.889 116.23,80.905 LED8--8-8.9@117.398,79.737 116.23,78.569 116.23,60.585 LED8-8-12.9@117.398,59.417 116.23,58.249 116.23,42.214 117.398,41.046 LED8-8-16.9@117.398,39.097
COLD: SCM.12 U5.14 | length 44.3
  Top Layer w0.254: v1(47.041,87.198) 47.777,87.935 47.777,96.291 v1(50.114,98.628) ; v1(55.753,78.105) 55.753,75.819 SCM.12@56.134,75.438
  Bottom Layer w0.254: U5.14@40.386,103.581 40.386,102.692 40.64,102.438 48.107,102.438 50.114,100.431 v1(50.114,98.628) ; v1(47.041,87.198) 47.041,86.487 47.549,85.979 47.549,82.829 49.251,81.128 51.765,81.128 52.502,80.391 52.502,79.248 53.645,78.105 v1(55.753,78.105)
COLUMNBUTTON: S-COL.2 SCM.14 | length 45.1
  Top Layer w0.254: S-COL.2@50.54,114.808 50.54,113.436 52.832,113.436 54.229,112.039 54.229,110.185 57.81,106.604 57.81,78.842 SCM.14@61.214,75.438
DS1302CLK: SCM.2 UCLOCK.7 | length 29.9
  Bottom Layer w0.254: UCLOCK.7@35.611,67.412 36.754,68.555 45.981,68.555 47.861,66.675 62.611,66.675 SCM.2@63.754,67.818
DS1302IO: SCM.3 UCLOCK.6 | length 37.7
  Top Layer w0.254: UCLOCK.6@38.151,67.412 38.151,71.526 v1(38.659,72.034) ; v1(54.229,69.977) v1(54.229,72.542) ; SCM.3@61.214,67.818 61.214,71.298 v1(62.459,72.542)
  Bottom Layer w0.254: v1(38.659,72.034) 46.965,72.034 49.515,69.484 53.736,69.484 v1(54.229,69.977) ; v1(54.229,72.542) v1(62.459,72.542)
DS1302RST: SCM.1 UCLOCK.5 | length 26.8
  Bottom Layer w0.254: UCLOCK.5@40.691,67.412 44.755,67.412 45.999,66.167 64.643,66.167 SCM.1@66.294,67.818
GND: 1117-1.1 1117-2.1 1117-3.1 1117-4.1 1117-5.1 C1.1 C2.1 C3.2 C4.2 C5.2 C6.2 C7.2 C8.2 DC005.2 DC005.3 R1.1 R2.1 SCM.8 U1.8 U1.13 U2.8 U2.13 U3.8 U3.13 U4.8 U4.13 U5.8 U5.13 U6.8 U6.13 U7.8 U7.13 U8.8 U8.13 UCLOCK.4 | length 499.9
  Top Layer w0.635: v1(26.568,88.646) 27.546,89.624 27.546,96.126 U1.8@30.226,98.806 ; v1(27.102,108.966) 27.102,101.93 U1.8@30.226,98.806 ; U4.8@30.226,34.798 28.396,36.628 28.396,48.129 27.38,49.145 27.38,50.99 28.88,52.49 28.88,54.788 U3.8@30.226,56.134 29.626,56.734 28.956,56.734 28.396,57.293 28.396,75.154 29.718,76.476 29.718,76.962 U2.8@30.226,77.47 31.725,75.971 31.725,72.853 31.832,72.746 C1.1@32.883,72.746 v1@32.883,71.427 ; v1(31.852,93.955) 31.852,97.18 U1.8@30.226,98.806 ; C2.1@32.883,69.698 32.703,69.698 32.704,69.716 32.864,71.249 v1@32.883,71.427 ; v1(32.883,71.247) v1@32.883,71.427 ; U5.13@42.926,103.581 v1(42.926,108.052) ; v1(82.144,109.55) 85.598,106.096 U7.13@85.598,103.581 ; U7.8@95.758,111.201 95.758,110.846 v1(99.619,107.772)
  Bottom Layer w0.635: U4.13@22.606,44.958 28.396,39.168 28.396,36.628 U4.8@30.226,34.798 26.518,31.09 25.4,31.09 C3.2@25.4,30.414 25.4,29.743 24.333,29.743 24.054,29.464 24.054,27.432 26.846,24.64 DC005.3@30.96,24.64 35.052,24.64 35.56,25.148 DC005.2@35.56,27.94 ; U3.13@22.606,66.294 24.878,64.022 24.878,61.482 U3.8@30.226,56.134 32.07,54.29 C7.2@35.56,54.29 37.882,54.29 38.202,54.61 41.236,54.61 41.49,54.356 41.49,51.308 41.222,51.04 ; v1(26.568,88.646) 25.552,87.63 U2.13@22.606,87.63 28.396,81.84 28.396,79.3 U2.8@30.226,77.47 ; v1(27.102,108.966) U1.13@22.606,108.966 26.516,112.876 27.94,112.876 28.622,113.558 28.622,117.359 29.348,118.085 32.995,118.085 33.591,117.488 46.886,117.488 47.178,117.196 R2.1@47.178,114.808 49.479,114.808 U5.8@53.086,111.201 ; v1(32.883,71.247) 35.27,73.635 38.151,73.635 ; C8.2@35.56,49.21 36.754,49.21 38.584,51.04 1117-4.1@39.822,51.04 41.222,51.04 ; C5.2@35.56,94.93 32.827,94.93 v1(31.852,93.955) 32.412,93.955 35.56,90.807 C6.2@35.56,89.85 36.754,89.85 38.584,91.68 1117-2.1@39.822,91.68 52.592,91.68 54.624,89.648 1117-3.1@54.624,88.082 54.624,88.062 75.908,88.062 76.606,88.76 81.128,88.76 81.585,89.218 85.479,89.218 86.572,90.31 87.884,90.31 89.433,88.76 98.623,88.76 100.103,87.28 103.913,87.28 105.241,88.608 109.398,88.608 109.982,89.192 109.982,90.653 109.728,90.907 106.655,90.907 106.375,91.186 106.375,93.98 106.643,94.248 1117-1.1@108.006,94.248 110.963,94.248 111.297,93.914 C4.2@112.268,93.914 ; UCLOCK.4@40.691,75.032 39.294,73.635 38.151,73.635 ; v1(42.926,108.052) 43.015,108.14 50.025,108.14 U5.8@53.086,111.201 ; SCM.8@48.514,67.818 48.514,69.139 46.368,71.285 39.865,71.285 39.319,70.739 36.805,70.739 37.084,71.247 37.084,72.568 38.151,73.635 ; 1117-5.1@54.116,47.95 54.116,50.481 53.557,51.04 41.222,51.04 ; U6.13@64.262,103.581 58.979,108.864 55.88,108.864 55.296,109.449 55.296,112.268 55.721,112.693 ; U6.8@74.422,111.201 73.85,111.773 ; v1(82.144,109.55) v1@82.144,109.855 ; v1(99.619,107.772) 99.619,107.747 102.768,107.747 U8.13@106.934,103.581 ; U8.8@117.094,111.201 115.722,112.573 97.13,112.573 U7.8@95.758,111.201 94.412,109.855 v1@82.144,109.855 ; U5.8@53.086,111.201 54.578,112.693 55.721,112.693 ; 55.721,112.693 60.303,112.693 61.402,113.792 R1.1@61.402,114.808 70.815,114.808 73.85,111.773 ; 73.85,111.773 73.85,113.792 74.105,114.047 75.692,114.047 76.268,113.471 76.268,110.236 76.649,109.855 v1@82.144,109.855
NetC1_2: C1.2 UCLOCK.2 Y1.2 | length 6.9
  Top Layer w0.508: Y1.2@32.994,78.232 32.994,77.648 UCLOCK.2@35.611,75.032 34.783,74.204 C1.2@34.783,72.746
NetC2_2: C2.2 UCLOCK.3 Y1.1 | length 11.8
  Top Layer w0.508: C2.2@34.783,69.698 36.576,69.698 37.44,70.561 37.44,74.32 UCLOCK.3@38.151,75.032 36.094,77.088 Y1.1@36.094,78.232
NetR1_2: R1.2 S-COL.1 | length 4.7
  Top Layer w0.254: S-COL.1@56.14,114.808 56.14,113.919 v1(57.76,113.919)
  Bottom Layer w0.254: v1(57.76,113.919) 58.547,114.706 59.502,114.706 R1.2@59.502,114.808
NetR2_2: R2.2 S-ROW.1 | length 5.7
  Top Layer w0.254: S-ROW.1@42.932,114.808 42.932,113.233 43.313,112.852 v1(44.77,112.852)
  Bottom Layer w0.254: v1(44.77,112.852) 45.278,113.36 R2.2@45.278,114.808
NetU1_9: U1.9 U2.14 | length 9.6
  Top Layer w0.254: U2.14@22.606,90.17 21.463,91.313 21.463,97.663 U1.9@22.606,98.806
NetU2_9: U2.9 U3.14 | length 9.6
  Top Layer w0.254: U3.14@22.606,68.834 21.463,69.977 21.463,76.327 U2.9@22.606,77.47
NetU3_9: U3.9 U4.14 | length 9.6
  Top Layer w0.254: U4.14@22.606,47.498 21.463,48.641 21.463,54.991 U3.9@22.606,56.134
NetU5_9: U5.9 U6.14 | length 11.5
  Bottom Layer w0.254: U5.9@53.086,103.581 56.54,107.036 58.268,107.036 U6.14@61.722,103.581
NetU6_9: U6.9 U7.14 | length 11.5
  Bottom Layer w0.254: U6.9@74.422,103.581 77.876,107.036 79.604,107.036 U7.14@83.058,103.581
NetU7_9: U7.9 U8.14 | length 11.3
  Bottom Layer w0.254: U7.9@95.758,103.581 98.933,106.756 101.219,106.756 U8.14@104.394,103.581
ROW1: LED8-8-1.1 LED8-8-2.1 LED8-8-3.1 LED8-8-4.1 U1.7 | length 129.9
  Top Layer w0.254: v1(37.008,98.552) 38.658,96.902 LED8-8-1.1@38.658,84.817 ; LED8-8-2.1@58.978,84.817 v1@58.978,94.462 ; v1(58.978,97.384) 58.978,94.564 v1@58.978,94.462 ; v1(59.08,94.564) v1@58.978,94.462 ; LED8-8-3.1@79.298,84.817 79.908,85.427 v1(79.908,92.913) v1(79.908,97.536) ; v1(99.111,96.114) 99.618,95.606 LED8-8-4.1@99.618,84.817
  Bottom Layer w0.254: U1.7@30.226,101.346 33.02,98.552 ; v1(37.008,98.552) 33.02,98.552 ; v1(58.978,97.384) 58.972,97.39 49.326,97.39 48.647,98.069 37.004,98.429 33.02,98.552 ; v1(59.08,94.564) 71.628,94.564 74.117,92.075 74.117,91.084 74.676,90.526 77.521,90.526 v1(79.908,92.913) ; v1(79.908,97.536) 80.145,97.772 97.452,97.772 v1(99.111,96.114)
ROW2: LED8-8-1.2 LED8-8-2.2 LED8-8-3.2 LED8-8-4.2 U1.6 | length 150.8
  Top Layer w0.254: U1.6@30.226,103.886 29.083,105.029 29.083,109.728 29.464,110.109 33.029,110.109 38.989,104.149 38.989,102.565 40.335,101.219 41.707,101.219 42.342,100.584 42.342,98.425 41.198,97.281 LED8-8-1.2@41.198,84.817 ; LED8-8-2.2@61.518,84.817 v1(61.518,97.409) ; LED8-8-3.2@81.838,84.817 82.448,85.427 v1(82.448,91.338) ; v1(101.371,89.459) 101.371,96.52 102.489,97.638 102.819,97.638 103.429,97.028 103.429,88.036 102.158,86.766 LED8-8-4.2@102.158,84.817
  Bottom Layer w0.254: LED8-8-1.2@41.198,84.817 42.849,86.468 44.355,86.468 46.38,88.494 47.752,88.494 48.057,88.189 48.057,86.69 48.768,85.979 60.356,85.979 LED8-8-2.2@61.518,84.817 ; v1(61.518,97.409) 62.382,96.545 71.73,96.545 74.219,94.056 80.239,94.056 82.448,91.846 v1(82.448,91.338) 82.88,91.77 92.331,91.77 93.823,90.278 100.552,90.278 v1(101.371,89.459)
ROW3: LED8-8-1.3 LED8-8-2.3 LED8-8-3.3 LED8-8-4.3 U1.5 | length 122.7
  Top Layer w0.254: v1(40.64,107.442) 41.58,106.502 41.58,103.327 42.494,102.413 43.155,102.413 44.882,100.686 44.882,91.351 43.738,90.208 LED8-8-1.3@43.738,84.817 43.738,82.347 v1(45.009,81.077) ; v1(62.789,78.334) 62.915,78.46 62.915,80.492 63.475,81.051 63.475,84.233 LED8-8-2.3@64.058,84.817 ; LED8-8-3.3@84.378,84.817 84.378,82.144 85.649,80.874 v1(85.649,78.384)
  Bottom Layer w0.254: U1.5@30.226,106.426 39.624,106.426 v1(40.64,107.442) ; v1(45.009,81.077) 45.009,79.176 45.591,78.594 51.632,78.594 53.137,77.089 61.544,77.089 v1(62.789,78.334) 65.075,78.334 66.853,76.556 78.35,76.556 80.179,78.384 v1(85.649,78.384) ; LED8-8-3.3@84.378,84.817 86.036,83.16 90.703,83.16 91.211,83.668 95.047,83.668 96.564,82.15 98.228,82.15 99.745,83.668 103.549,83.668 LED8-8-4.3@104.698,84.817
ROW4: LED8-8-1.4 LED8-8-2.4 LED8-8-3.4 LED8-8-4.4 U1.4 | length 129.8
  Top Layer w0.254: U1.4@30.226,108.966 33.874,105.318 33.874,98.511 36.17,96.215 v1(36.17,86.411) ; LED8-8-1.4@46.278,84.817 48.952,82.144 v1(49.784,82.144) ; LED8-8-2.4@66.598,84.817 65.888,84.106 65.888,81.077 65.43,80.62 65.43,79.288 67.147,77.572 v1(67.869,77.572) ; LED8-8-3.4@86.918,84.817 87.274,85.173 v1(87.274,89.103)
  Bottom Layer w0.254: v1(36.17,86.411) 38.988,86.411 40.055,85.344 40.055,84.259 40.64,83.674 45.135,83.674 LED8-8-1.4@46.278,84.817 ; v1(49.784,82.144) 52.883,82.144 54.127,80.899 64.567,80.899 65.202,80.264 65.202,79.248 66.878,77.572 v1(67.869,77.572) ; LED8-8-2.4@66.598,84.817 67.741,83.674 72.822,83.674 72.923,83.776 72.923,85.344 73.558,85.979 74.727,85.979 75.362,85.344 75.362,84.531 76.219,83.674 77.248,83.674 78.13,84.557 78.13,85.35 79.248,86.468 82.252,86.468 83.287,87.503 84.95,87.503 85.331,87.122 85.331,86.404 LED8-8-3.4@86.918,84.817 ; v1(87.274,89.103) 88.544,87.833 98.562,87.833 100.137,86.258 105.385,86.258 106.705,87.579 107.696,87.579 108.102,87.173 108.102,84.817 LED8-8-4.4@107.238,84.817